# EAGLE board uno (EAGLE 6.1)
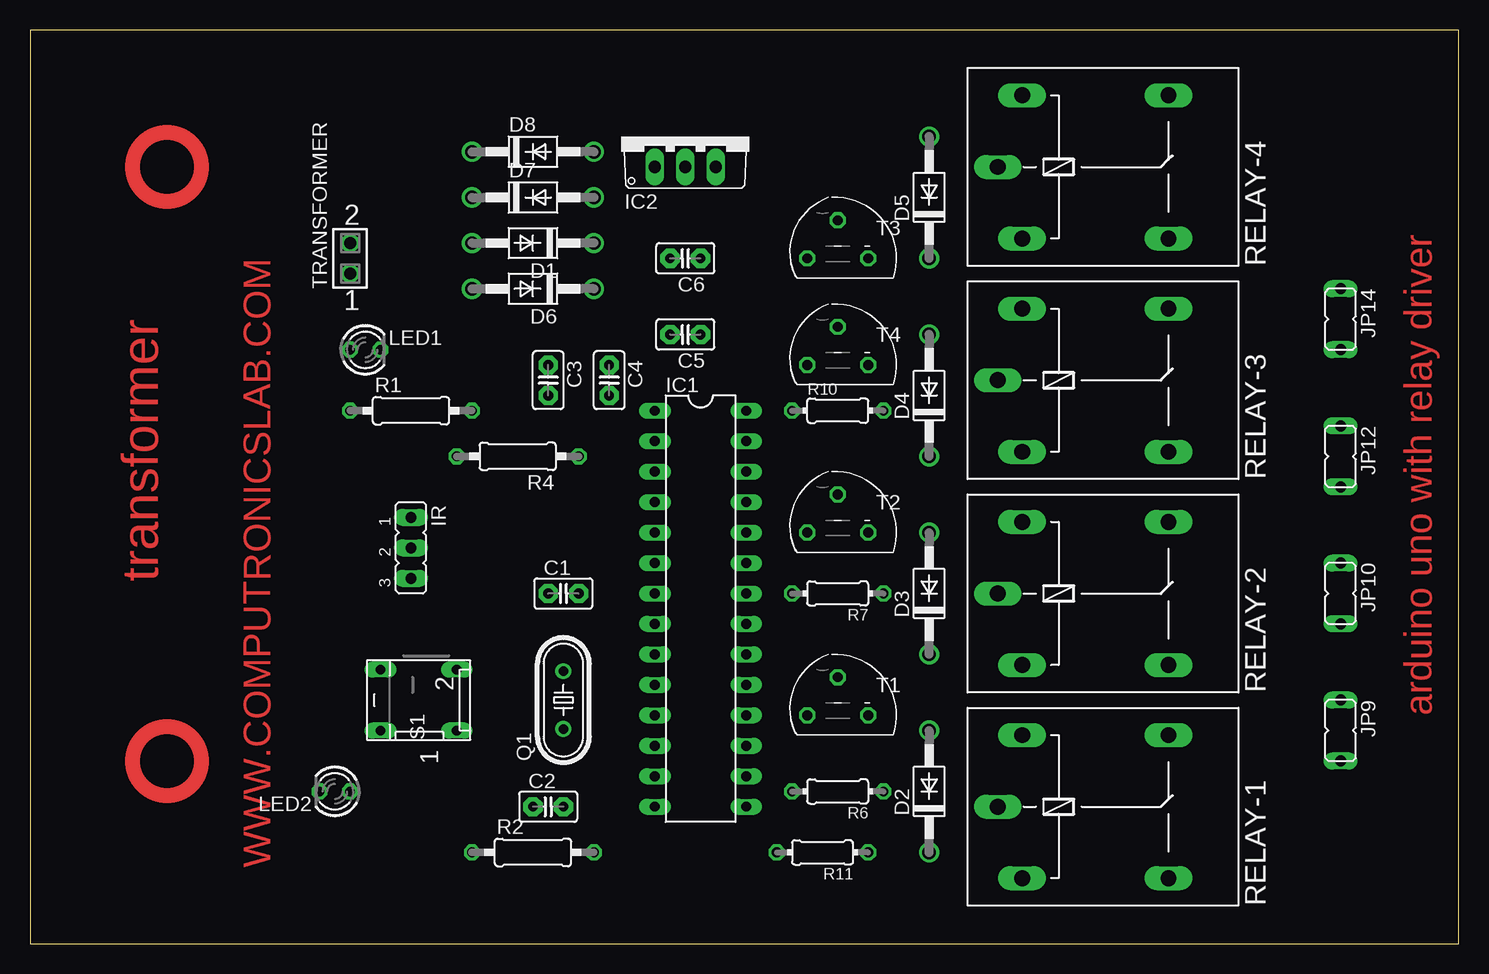
[diagram p0: board, top side]
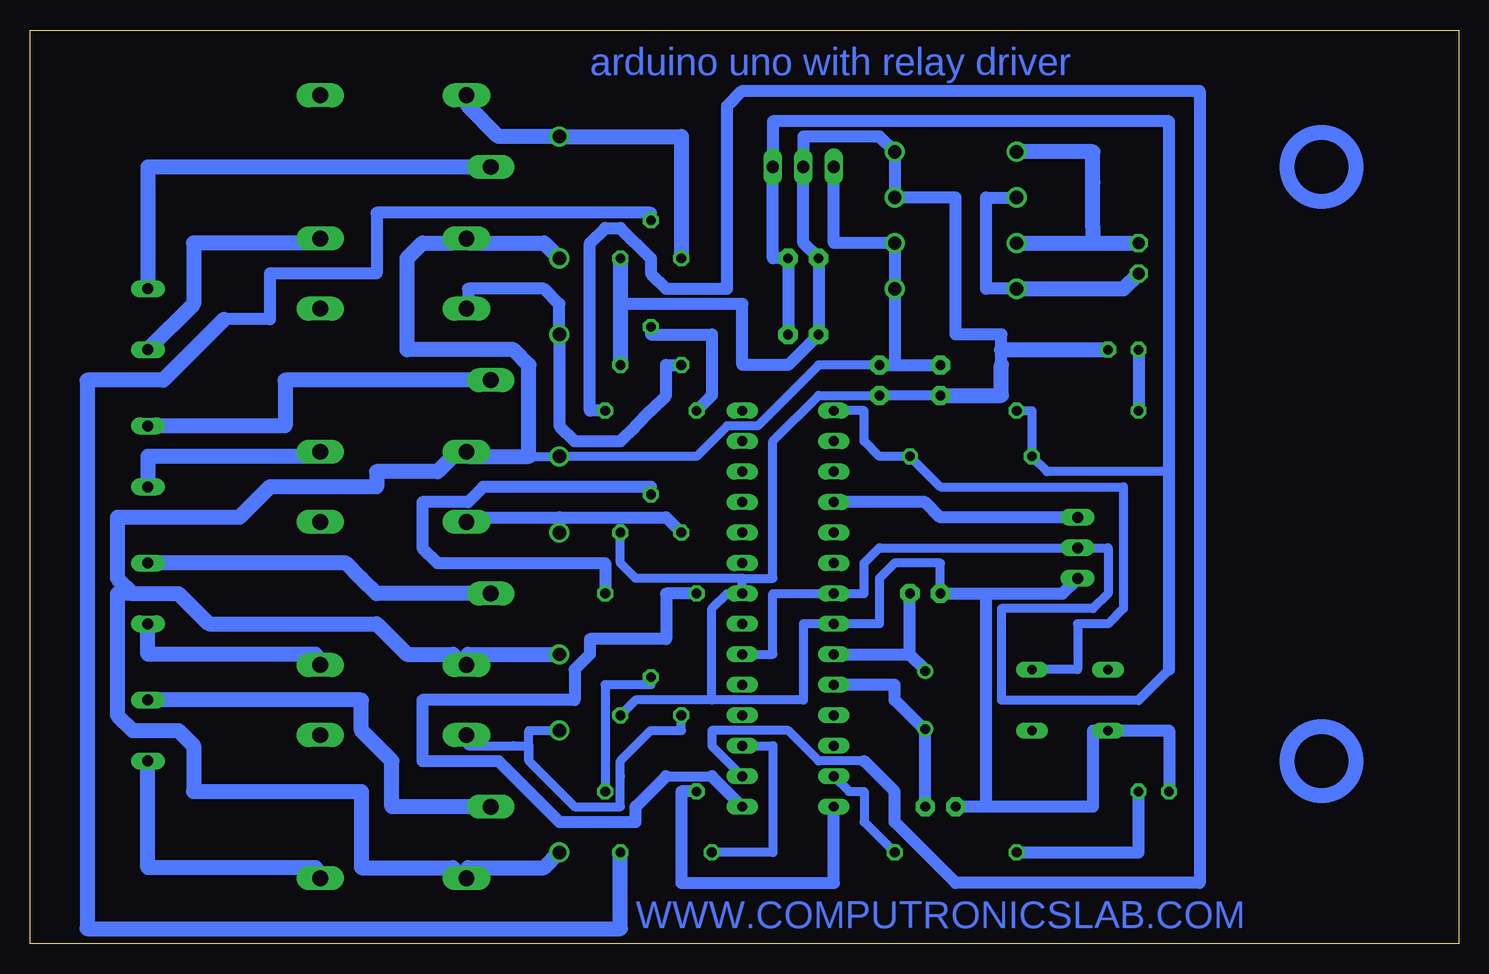
[diagram p1: board, bottom side, seen from below]

Size 119.05 x 76.19 mm. Coordinates in mm from the lower left corner, seen from the top.
Outline: 0,0 119.05,0 119.05,76.19 0,76.19 0,0
Copper layers (1*16): Top 0.035mm / dielectric 1.5mm / Bottom 0.035mm
Design rules: minimum track width 30mil, minimum drill 24mil, track to track 8mil, track to pad 8mil, pad to pad 8mil, via to via 8mil, smd to smd 8mil, copper to edge 40mil, drill to drill 8mil, minimum pad ring 10mil, minimum via ring 8mil, stop-mask expansion 4mil, vias tented up to drill 0mil, thermal gap 10mil

## Footprints (pad centres in the part's own frame; a part is rotated, then mirrored left to right if it is on the bottom)
C2.5-2 = drill 0.813 pad 1.6 octagon: 1 -1.27,0; 2 1.27,0
DO41-10 = drill 1.118: A 5.08,0; C -5.08,0
DIL28-3 = drill 0.813 long: 1 -16.51,-3.81; 2 -13.97,-3.81; 3 -11.43,-3.81; 4 -8.89,-3.81; 5 -6.35,-3.81; 6 -3.81,-3.81; 7 -1.27,-3.81; 8 1.27,-3.81; 9 3.81,-3.81; 10 6.35,-3.81; 11 8.89,-3.81; 12 11.43,-3.81; 13 13.97,-3.81; 14 16.51,-3.81; 15 16.51,3.81; 16 13.97,3.81; 17 11.43,3.81; 18 8.89,3.81; 19 6.35,3.81; 20 3.81,3.81; 21 1.27,3.81; 22 -1.27,3.81; 23 -3.81,3.81; 24 -6.35,3.81; 25 -8.89,3.81; 26 -11.43,3.81; 27 -13.97,3.81; 28 -16.51,3.81
TO220V = drill 1.016 long: 1 -2.54,-2.54; 2 0,-2.54; 3 2.54,-2.54
JP2 = drill 0.914 long: 1 -2.54,0; 2 0,0; 3 2.54,0
JP1 = drill 0.914 long: 1 0,-2.54; 2 0,2.54
LED3MM = drill 0.813 octagon: A -1.27,0; K 1.27,0
HC49/S = drill 0.813: 1 -2.413,0; 2 2.413,0
0207/10 = drill 0.813 octagon: 1 -5.08,0; 2 5.08,0
0204/7 = drill 0.813 octagon: 1 -3.81,0; 2 3.81,0
G5LE = drill 1.321 long: 1 -7.493,-5.969; 2 -7.493,5.969; O 4.699,5.969; P -9.525,0; S 4.699,-5.969
DP-02 = drill 0.813 long: 1 -2.54,-2.54; 2 2.54,-2.54; 3 2.54,3.81; 4 -2.54,3.81
TO92 = drill 0.813 octagon: 1 2.54,-1.27; 2 0,1.905; 3 -2.54,-1.27
SSW-101-02-S-D = drill 1 pad 1.5 octagon: 1 0,-1.27; 2 0,1.27

## Placement (x,y rotation side)
C1  22pf  [C2.5-2]  44.45,29.21 0 top
C2  22pf  [C2.5-2]  43.18,11.43 0 top
C3  470uF  [C2.5-2]  43.18,46.99 270 top
C4  0.1uf  [C2.5-2]  48.26,46.99 270 top
C5  0.1uf  [C2.5-2]  54.61,50.8 180 top
C6  4.7uf  [C2.5-2]  54.61,57.15 180 top
D1  1N4007  [DO41-10]  41.91,58.42 180 top
D2  1N4007  [DO41-10]  74.93,12.7 90 top
D3  1N4007  [DO41-10]  74.93,29.21 90 top
D4  1N4007  [DO41-10]  74.93,45.72 90 top
D5  1N4007  [DO41-10]  74.93,62.23 90 top
D6  1N4007  [DO41-10]  41.91,54.61 180 top
D7  1N4007  [DO41-10]  41.91,62.23 0 top
D8  1N4007  [DO41-10]  41.91,66.04 0 top
IC1  ATMEGA328  [DIL28-3]  55.88,27.94 270 top
IC2  7805  [TO220V]  54.61,67.31 0 top
IR  3 pin  [JP2]  31.75,33.02 270 top
JP9  AC CONNECTOR  [JP1]  109.22,17.78 180 top
JP10  AC CONNECTOR  [JP1]  109.22,29.21 180 top
JP12  AC CONNECTOR  [JP1]  109.22,40.64 180 top
JP14  AC CONNECTOR  [JP1]  109.22,52.07 180 top
LED1  [LED3MM]  27.94,49.53 0 top
LED2  [LED3MM]  25.4,12.7 180 top
Q1  16MHZ  [HC49/S]  44.45,20.32 90 top
R1  220R  [0207/10]  31.75,44.45 0 top
R2  330R  [0207/10]  41.91,7.62 0 top
R4  10K  [0207/10]  40.64,40.64 180 top
R6  5.6K  [0204/7]  67.31,12.7 180 top
R7  5.6K  [0204/7]  67.31,29.21 180 top
R10  5.6K  [0204/7]  67.31,44.45 0 top
R11  5.6K  [0204/7]  66.04,7.62 180 top
RELAY-1  12V  [G5LE]  90.17,11.43 0 top
RELAY-2  12V  [G5LE]  90.17,29.21 0 top
RELAY-3  12V  [G5LE]  90.17,46.99 0 top
RELAY-4  12V  [G5LE]  90.17,64.77 0 top
S1  [DP-02]  33.02,20.32 90 top
T1  BC547  [TO92]  67.31,20.32 0 top
T2  BC547  [TO92]  67.31,35.56 0 top
T3  BC547  [TO92]  67.31,58.42 0 top
T4  BC547  [TO92]  67.31,49.53 0 top
TRANSFORMER  hole  [SSW-101-02-S-D]  26.67,57.15 0 top

## Library data of the parts
C1-C6 = capacitor-wima
D1-D8 = diode
IC1 = quantum-research-group; OC_FARNELL: unknown; OC_NEWARK: unknown
IC2 = linear
IR JP9 JP10 JP12 JP14 = jumper
LED1 LED2 = led
Q1 = crystal; OC_FARNELL: 1667008; OC_NEWARK: unknown
R1 R2 R4 R6 R7 R10 R11 = rcl
RELAY-1-RELAY-4 = relay; OC_FARNELL: unknown; OC_NEWARK: unknown
S1 = switch-dil; MPN: MCDP02; OC_FARNELL: 1255233; OC_NEWARK: 26M1095
T1-T4 = transistor
TRANSFORMER = con-samtec; MPN: SSW-101-02-S-D; OC_FARNELL: unknown; OC_NEWARK: 82P1456

## Nets
N$1: C1.2 IC1.9 Q1.2
N$2: C2.2 IC1.10 Q1.1
N$3: D6.A D7.C TRANSFORMER.1
N$4: C5.1 C6.1 IC1.7 IC1.20 IC2.3 IR.2 R1.2 R4.2
N$6: LED1.A R1.1
N$7: C3.1 C4.1 D1.C D2.C D3.C D4.C D5.C D6.C IC2.1 RELAY-1.1 RELAY-2.1 RELAY-3.1 RELAY-4.1
N$14: IC1.4 IR.1
N$17: D1.A D8.C TRANSFORMER.2
N$21: IC1.13 R2.2
N$22: C1.1 C2.1 C3.2 C4.2 C5.2 C6.2 D7.A D8.A IC1.8 IC1.22 IC2.2 IR.3 LED1.K LED2.K S1.4 T1.1 T2.1 T3.1 T4.1
N$28: D2.A RELAY-1.2 T1.3
N$29: R7.1 T2.2
N$30: R6.1 T1.2
N$31: IC1.1 R4.1 S1.2
N$32: LED2.A R2.1
N$35: JP9.2 RELAY-1.S
N$36: JP9.1 RELAY-1.P
N$38: JP10.2 RELAY-2.S
N$39: JP10.1 RELAY-2.P
N$41: IC1.14 R6.2
N$42: D3.A RELAY-2.2 T2.3
N$43: D4.A RELAY-3.2 T4.3
N$45: R11.1 T3.2
N$46: R10.1 T4.2
N$49: JP12.2 RELAY-3.S
N$50: JP12.1 RELAY-3.P
N$51: JP14.2 RELAY-4.S
N$53: JP14.1 RELAY-4.P
N$56: IC1.16 R10.2
N$57: IC1.17 R11.2
N$58: D5.A RELAY-4.2 T3.3
N$59: IC1.15 R7.2

## Tracks (layer width: path | path; a pad name or v marks a point on that pad's centre or on a via)
N$1
  Bottom 0.762: 44.45,22.86 Q1.2
  Bottom 1.016: 45.72,24.13 44.45,22.86 | IC1.9 45.72,24.13 | 45.72,24.13 C1.2
N$2
  Bottom 0.762: 44.45,17.78 Q1.1
  Bottom 1.016: C2.2 44.45,17.78 46.99,20.32 46.99,21.59 IC1.10
N$3
  Bottom 1.016: D7.C 39.37,62.23 39.37,59.69 39.37,54.61 D6.A
  Bottom 1.27: TRANSFORMER.1 27.94,54.61 D6.A
N$4
  Bottom 0.762: R1.2 35.56,44.45 R4.2 34.29,39.37 24.13,39.37 | IC1.20 57.15,24.13 57.15,29.21 IC1.7 49.53,29.21 49.53,31.75 48.26,33.02 IR.2 29.21,33.02 29.21,29.21 30.48,27.94 38.1,27.94 38.1,20.32 26.67,20.32
  Bottom 0.813: 26.67,20.32 24.13,22.86
  Bottom 1.016: C5.1 C6.1 57.15,57.15 IC2.3 57.15,68.58 24.13,68.58 24.13,39.37 24.13,22.86
N$6
  Bottom 1.016: LED1.A R1.1
N$7
  Bottom 0.762: 77.47,40.64 D4.C 63.5,40.64 60.96,43.18 58.42,43.18 53.34,48.26 C4.1 | 83.82,40.64 RELAY-3.1 | 83.82,58.42 RELAY-4.1
  Bottom 1.016: C4.1 46.99,48.26 | 46.99,48.26 C3.1 | IC2.1 52.07,58.42 D1.C D6.C 46.99,48.26
  Bottom 1.27: D2.C 76.2,6.35 82.55,6.35 RELAY-1.1 83.82,6.35 91.44,6.35 91.44,12.7 105.41,12.7 105.41,16.51 106.68,17.78 110.49,17.78 111.76,19.05 111.76,29.21 110.49,29.21 | D5.C 76.2,58.42 82.55,58.42 RELAY-4.1 | D3.C 82.55,24.13 RELAY-2.1 83.82,24.13 87.63,24.13 90.17,26.67 104.14,26.67 106.68,29.21 110.49,29.21 | RELAY-3.1 82.55,40.64 77.47,40.64 77.47,48.26 78.74,49.53 87.63,49.53 87.63,57.15 86.36,58.42 83.82,58.42 | 110.49,29.21 111.76,30.48 111.76,35.56 101.6,35.56 99.06,38.1 90.17,38.1 90.17,39.37 85.09,39.37 83.82,40.64
N$14
  Bottom 1.016: IR.1 43.18,35.56 44.45,36.83 IC1.4
N$17
  Bottom 1.27: D1.A 30.48,58.42 | D8.C 30.48,66.04 30.48,63.5 30.48,59.69 30.48,58.42 | 30.48,58.42 TRANSFORMER.2
N$21
  Bottom 0.762: R2.2 49.53,10.16 49.53,12.7 50.8,12.7 IC1.13
N$22
  Bottom 0.762: T1.1 68.58,20.32 62.23,20.32 | 62.23,20.32 54.61,20.32 54.61,26.67 IC1.8 48.26,26.67 48.26,30.48 46.99,31.75 43.18,31.75 C1.1 | 62.23,20.32 62.23,27.94 60.96,29.21 IC1.22 59.69,30.48 | T2.1 69.85,31.75 68.58,30.48 59.69,30.48 | S1.4 30.48,17.78 | C4.2 53.34,45.72 57.15,41.91 57.15,30.48 59.69,30.48
  Bottom 0.813: 38.1,48.26 38.1,49.53 | C3.2 C4.2
  Bottom 1.016: 69.85,53.34 59.69,53.34 59.69,48.26 55.88,48.26 C5.2 C6.2 54.61,58.42 IC2.2 54.61,67.31 48.26,67.31 D8.A D7.A 41.91,62.23 41.91,50.8 38.1,50.8 38.1,48.26 | IR.3 33.02,29.21 39.37,29.21 | C1.1 39.37,29.21 | S1.4 24.13,17.78 LED2.K | 39.37,11.43 C2.1 | 30.48,17.78 30.48,11.43 39.37,11.43 | 39.37,11.43 39.37,29.21
  Bottom 1.27: T3.1 69.85,53.34 T4.1 | 38.1,49.53 LED1.K | C3.2 38.1,45.72 38.1,48.26
N$28
  Bottom 0.762: T1.3 64.77,17.78 67.31,17.78 69.85,15.24 69.85,13.97 69.85,11.43 73.66,11.43 77.47,15.24 | 77.47,15.24 77.47,16.51 78.74,16.51 82.55,16.51 RELAY-1.2 | 77.47,15.24 77.47,17.78 D2.A
N$29
  Bottom 0.762: 67.31,38.1 T2.2
  Bottom 1.016: R7.1 71.12,31.75 85.09,31.75 86.36,33.02 86.36,36.83 82.55,36.83 81.28,38.1 67.31,38.1
N$30
  Bottom 0.762: R6.1 71.12,21.59 67.31,21.59 T1.2
N$31
  Bottom 0.762: S1.2 31.75,22.86 31.75,26.67 29.21,26.67 27.94,27.94 27.94,38.1 43.18,38.1 R4.1 48.26,40.64 49.53,41.91 49.53,44.45 IC1.1
N$32
  Bottom 1.016: LED2.A 26.67,7.62 R2.1
N$35
  Bottom 1.27: JP9.2 109.22,6.35 95.25,6.35 RELAY-1.S
N$36
  Bottom 1.27: JP9.1 91.44,20.32 91.44,17.78 88.9,15.24 88.9,11.43 RELAY-1.P
N$38
  Bottom 1.27: JP10.2 109.22,24.13 106.68,24.13 95.25,24.13 RELAY-2.S
N$39
  Bottom 1.27: JP10.1 92.71,31.75 91.44,30.48 90.17,29.21 RELAY-2.P
N$41
  Bottom 1.016: IC1.14 52.07,5.08 64.77,5.08 64.77,12.7 R6.2
N$42
  Bottom 0.762: 82.55,35.56 RELAY-2.2
  Bottom 1.016: T2.3 66.04,35.56 74.93,35.56 | 82.55,35.56 74.93,35.56 | 74.93,35.56 D3.A
N$43
  Bottom 0.762: 82.55,53.34 RELAY-3.2
  Bottom 1.016: T4.3 66.04,48.26 66.04,45.72 67.31,44.45 68.58,43.18 69.85,41.91 73.66,41.91 74.93,43.18 D4.A 74.93,53.34 76.2,54.61 82.55,54.61 82.55,53.34
N$45
  Bottom 0.762: 67.31,60.96 T3.2
  Bottom 1.016: 102.87,52.07 99.06,52.07 99.06,55.88 90.17,55.88 90.17,60.96 67.31,60.96
  Bottom 1.27: R11.1 69.85,1.27 114.3,1.27 114.3,46.99 107.95,46.99 102.87,52.07
N$46
  Bottom 0.762: 67.31,50.8 T4.2
  Bottom 1.016: R10.1 62.23,45.72 62.23,50.8 67.31,50.8
N$49
  Bottom 1.27: JP12.2 109.22,39.37 109.22,40.64 106.68,40.64 95.25,40.64 RELAY-3.S
N$50
  Bottom 1.27: JP12.1 97.79,43.18 97.79,46.99 RELAY-3.P
N$51
  Bottom 1.27: JP14.2 105.41,53.34 105.41,58.42 100.33,58.42 95.25,58.42 RELAY-4.S
N$53
  Bottom 1.27: JP14.1 109.22,64.77 RELAY-4.P
N$56
  Bottom 0.762: IC1.16 62.23,16.51 62.23,17.78 55.88,17.78 53.34,15.24 49.53,15.24
  Bottom 1.016: 49.53,15.24 46.99,12.7 46.99,10.16 41.91,5.08 21.59,5.08 21.59,71.12 59.69,71.12 60.96,69.85 60.96,54.61 66.04,54.61 67.31,55.88 67.31,57.15 69.85,59.69 71.12,59.69 72.39,58.42 72.39,44.45 R10.2
N$57
  Bottom 0.762: R11.2 57.15,7.62 57.15,16.51 IC1.17
N$58
  Bottom 1.27: T3.3 64.77,67.31 D5.A 80.01,67.31 82.55,69.85 RELAY-4.2
N$59
  Bottom 0.813: 66.04,13.97 62.23,13.97
  Bottom 1.016: 62.23,13.97 IC1.15 | 66.04,13.97 68.58,11.43 68.58,10.16 74.93,10.16 80.01,15.24 86.36,15.24 86.36,20.32 73.66,20.32 73.66,22.86 72.39,24.13 72.39,25.4 66.04,25.4 66.04,29.21 R7.2
(copper drawn outside any net)
  shapes: Bottom circle x2, Top circle x2

## Text on the board
Top: WWW.COMPUTRONICSLAB.COM | transformer | arduino uno with relay driver
Bottom: arduino uno with relay driver | WWW.COMPUTRONICSLAB.COM